# Altium PCB RF_board_rev3.PcbDoc
Units mil, origin at the board's own origin, x right, y up, seen from the top; angles counter-clockwise.
Board outline 4000 x 4000 mil, 4 copper layers (915MHz_top, 915MHz_bottom, 433MHz_bottom, 433MHz_top), stack 38.2 mil thick; 87 components, 63 nets, 381 pads, 488 vias.
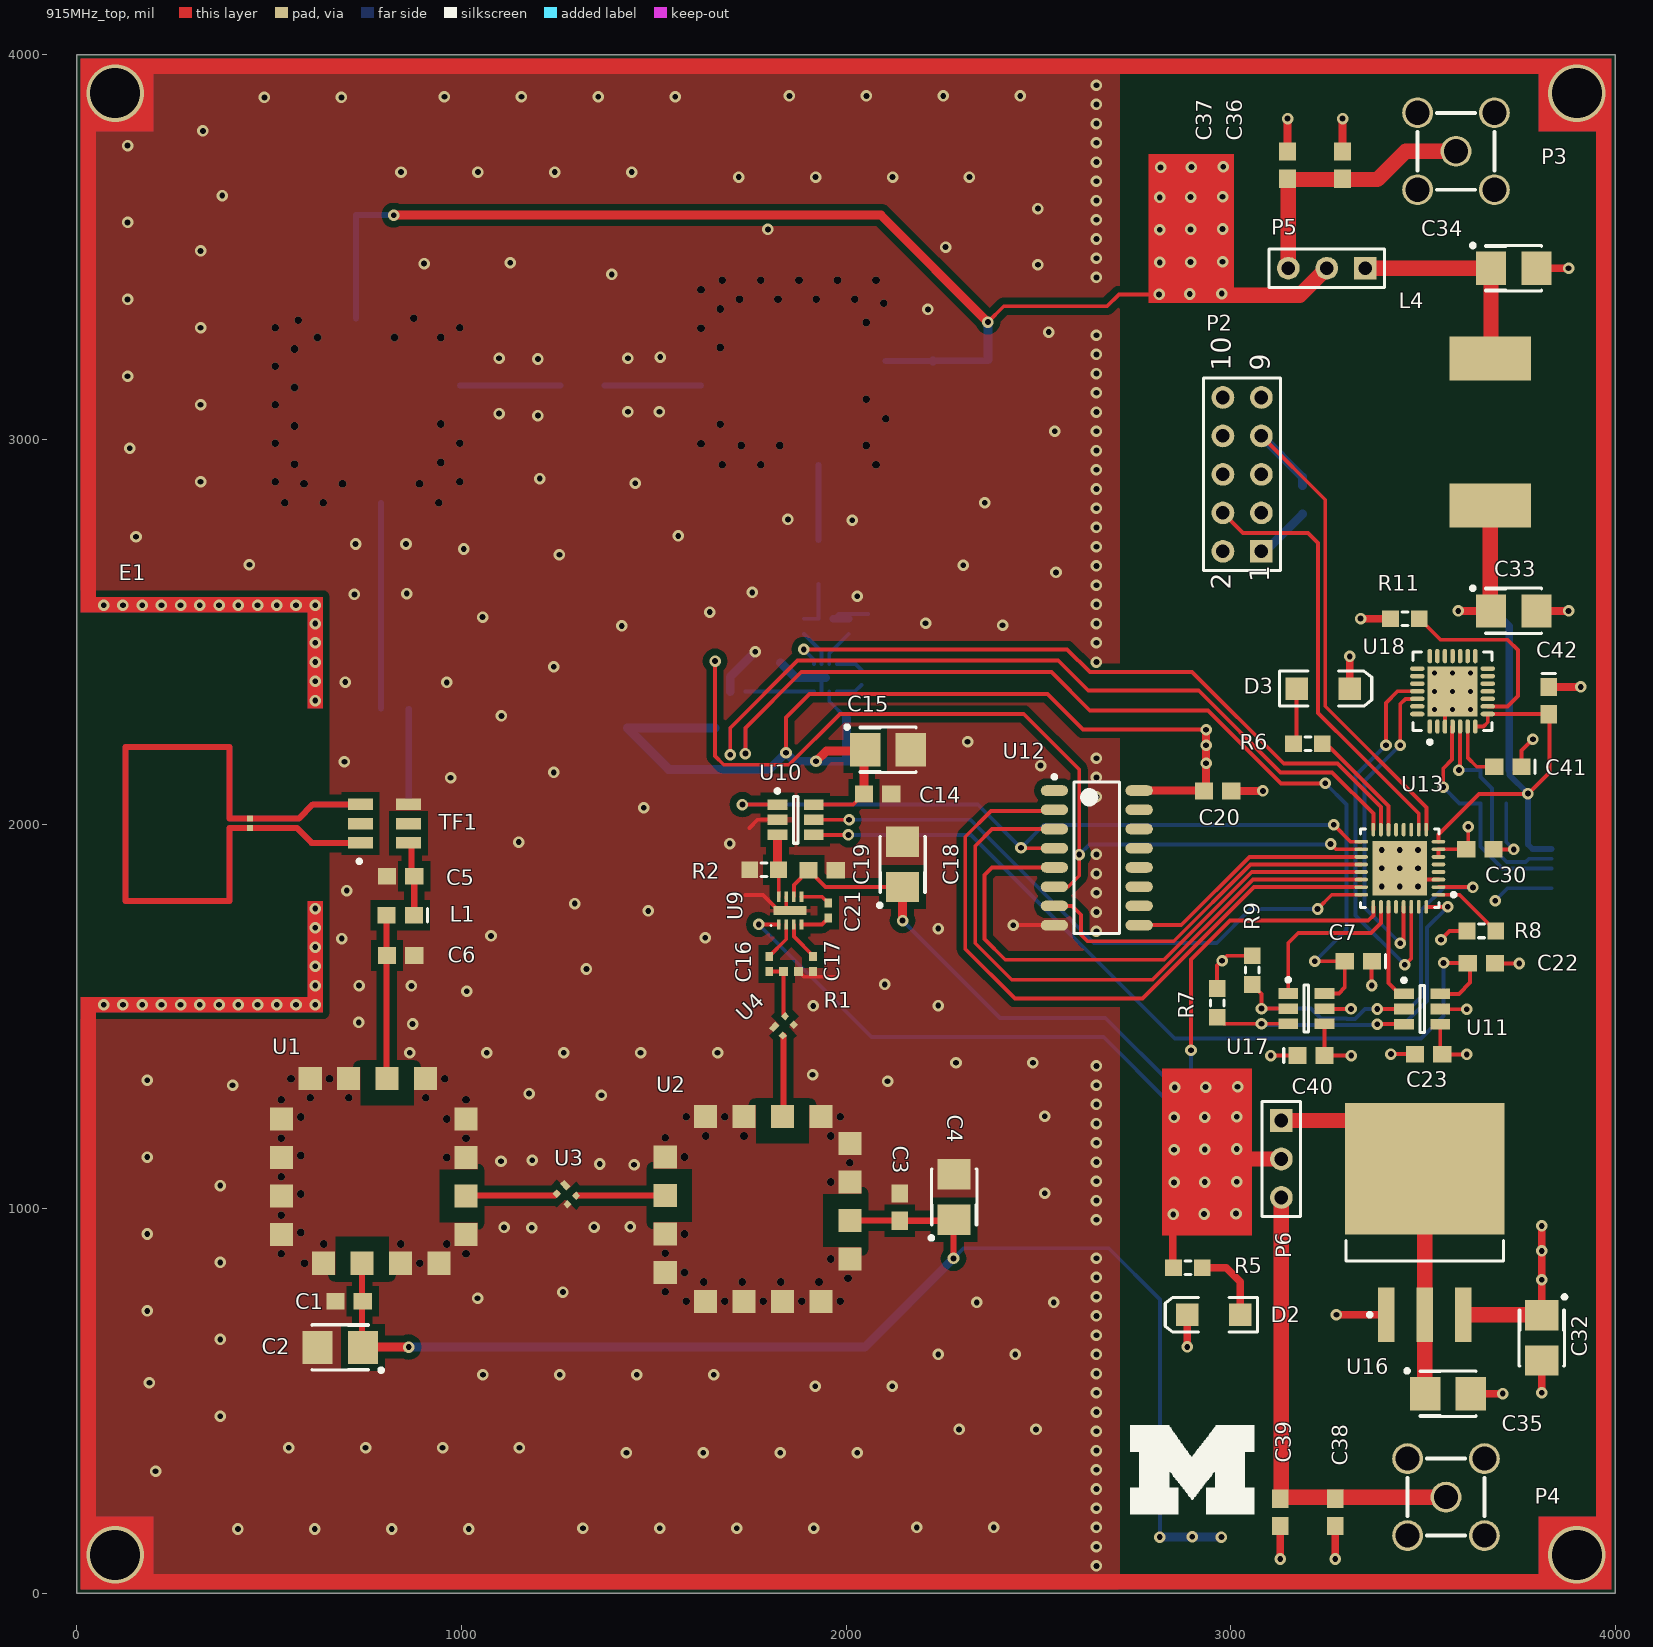
[diagram p0: 915MHz_top view]
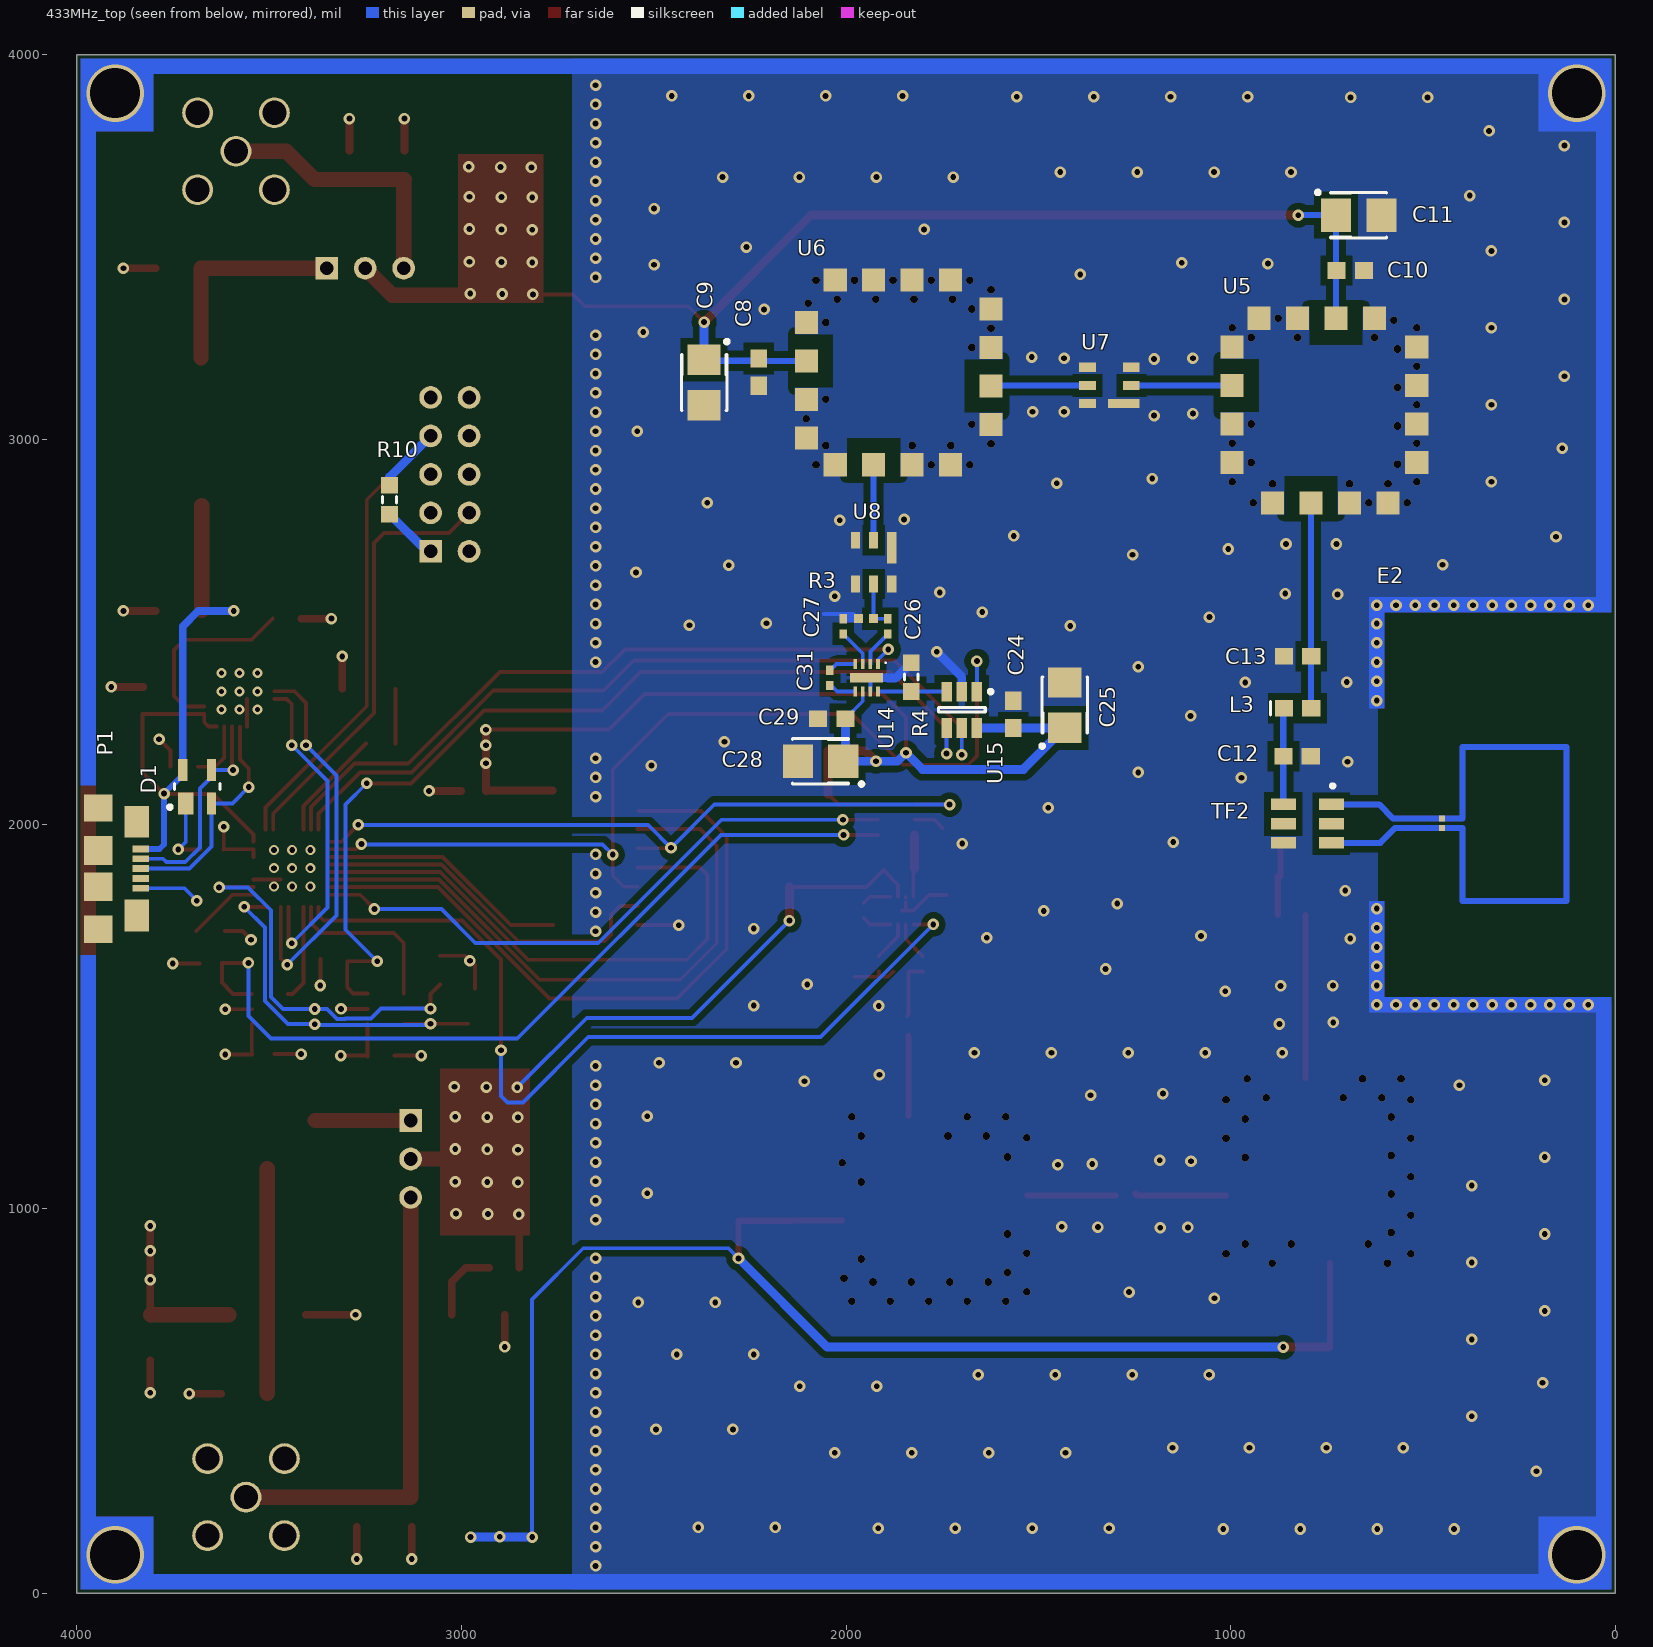
[diagram p1: 433MHz_top view, seen from below]
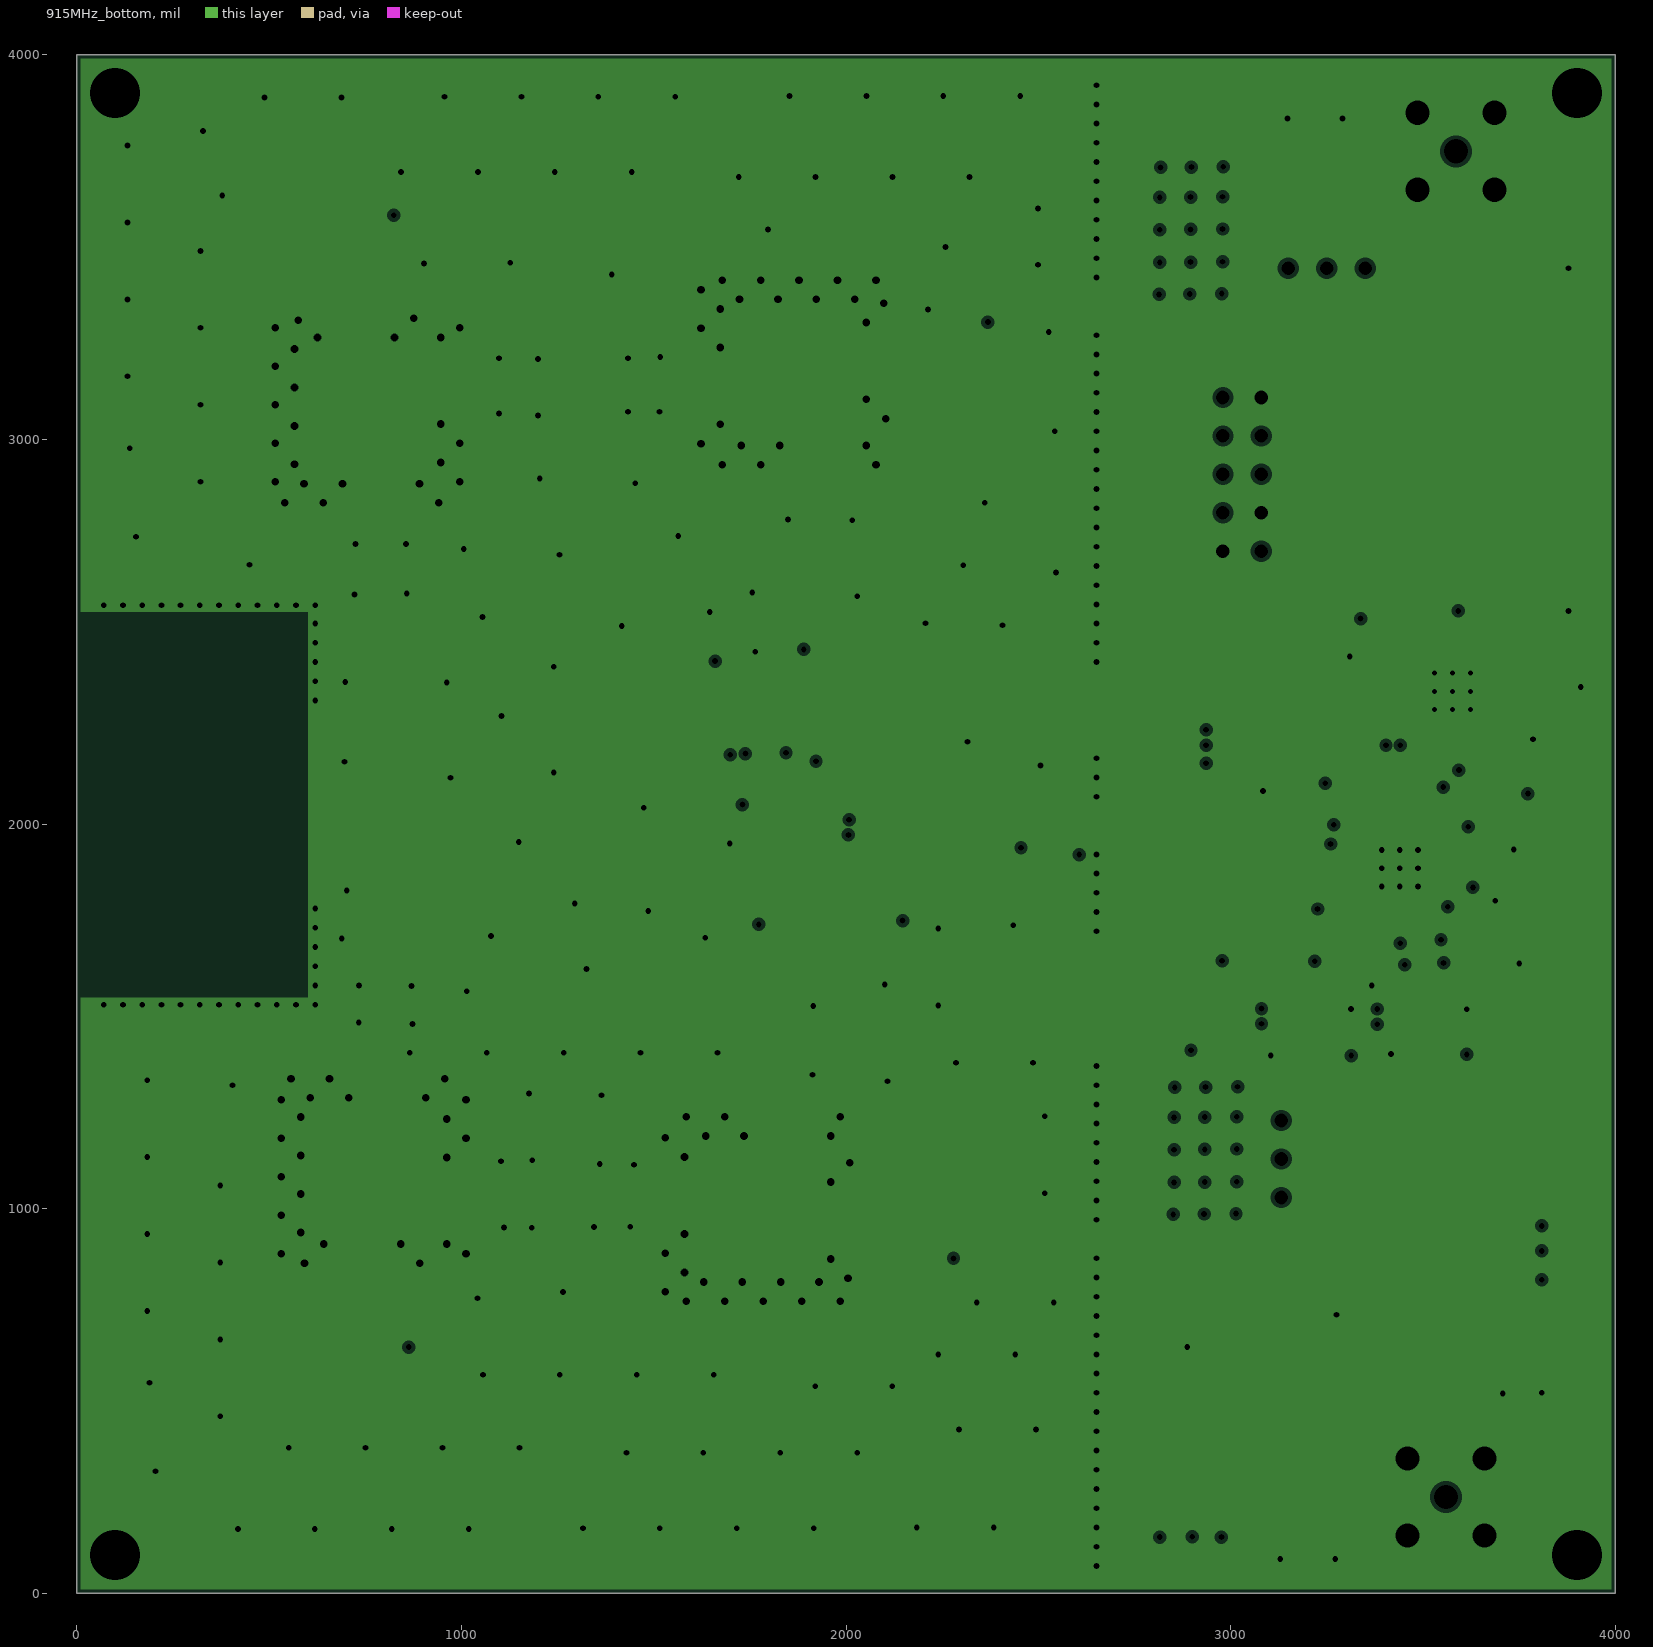
[diagram p2: 915MHz_bottom, clearances drawn from the general rule]
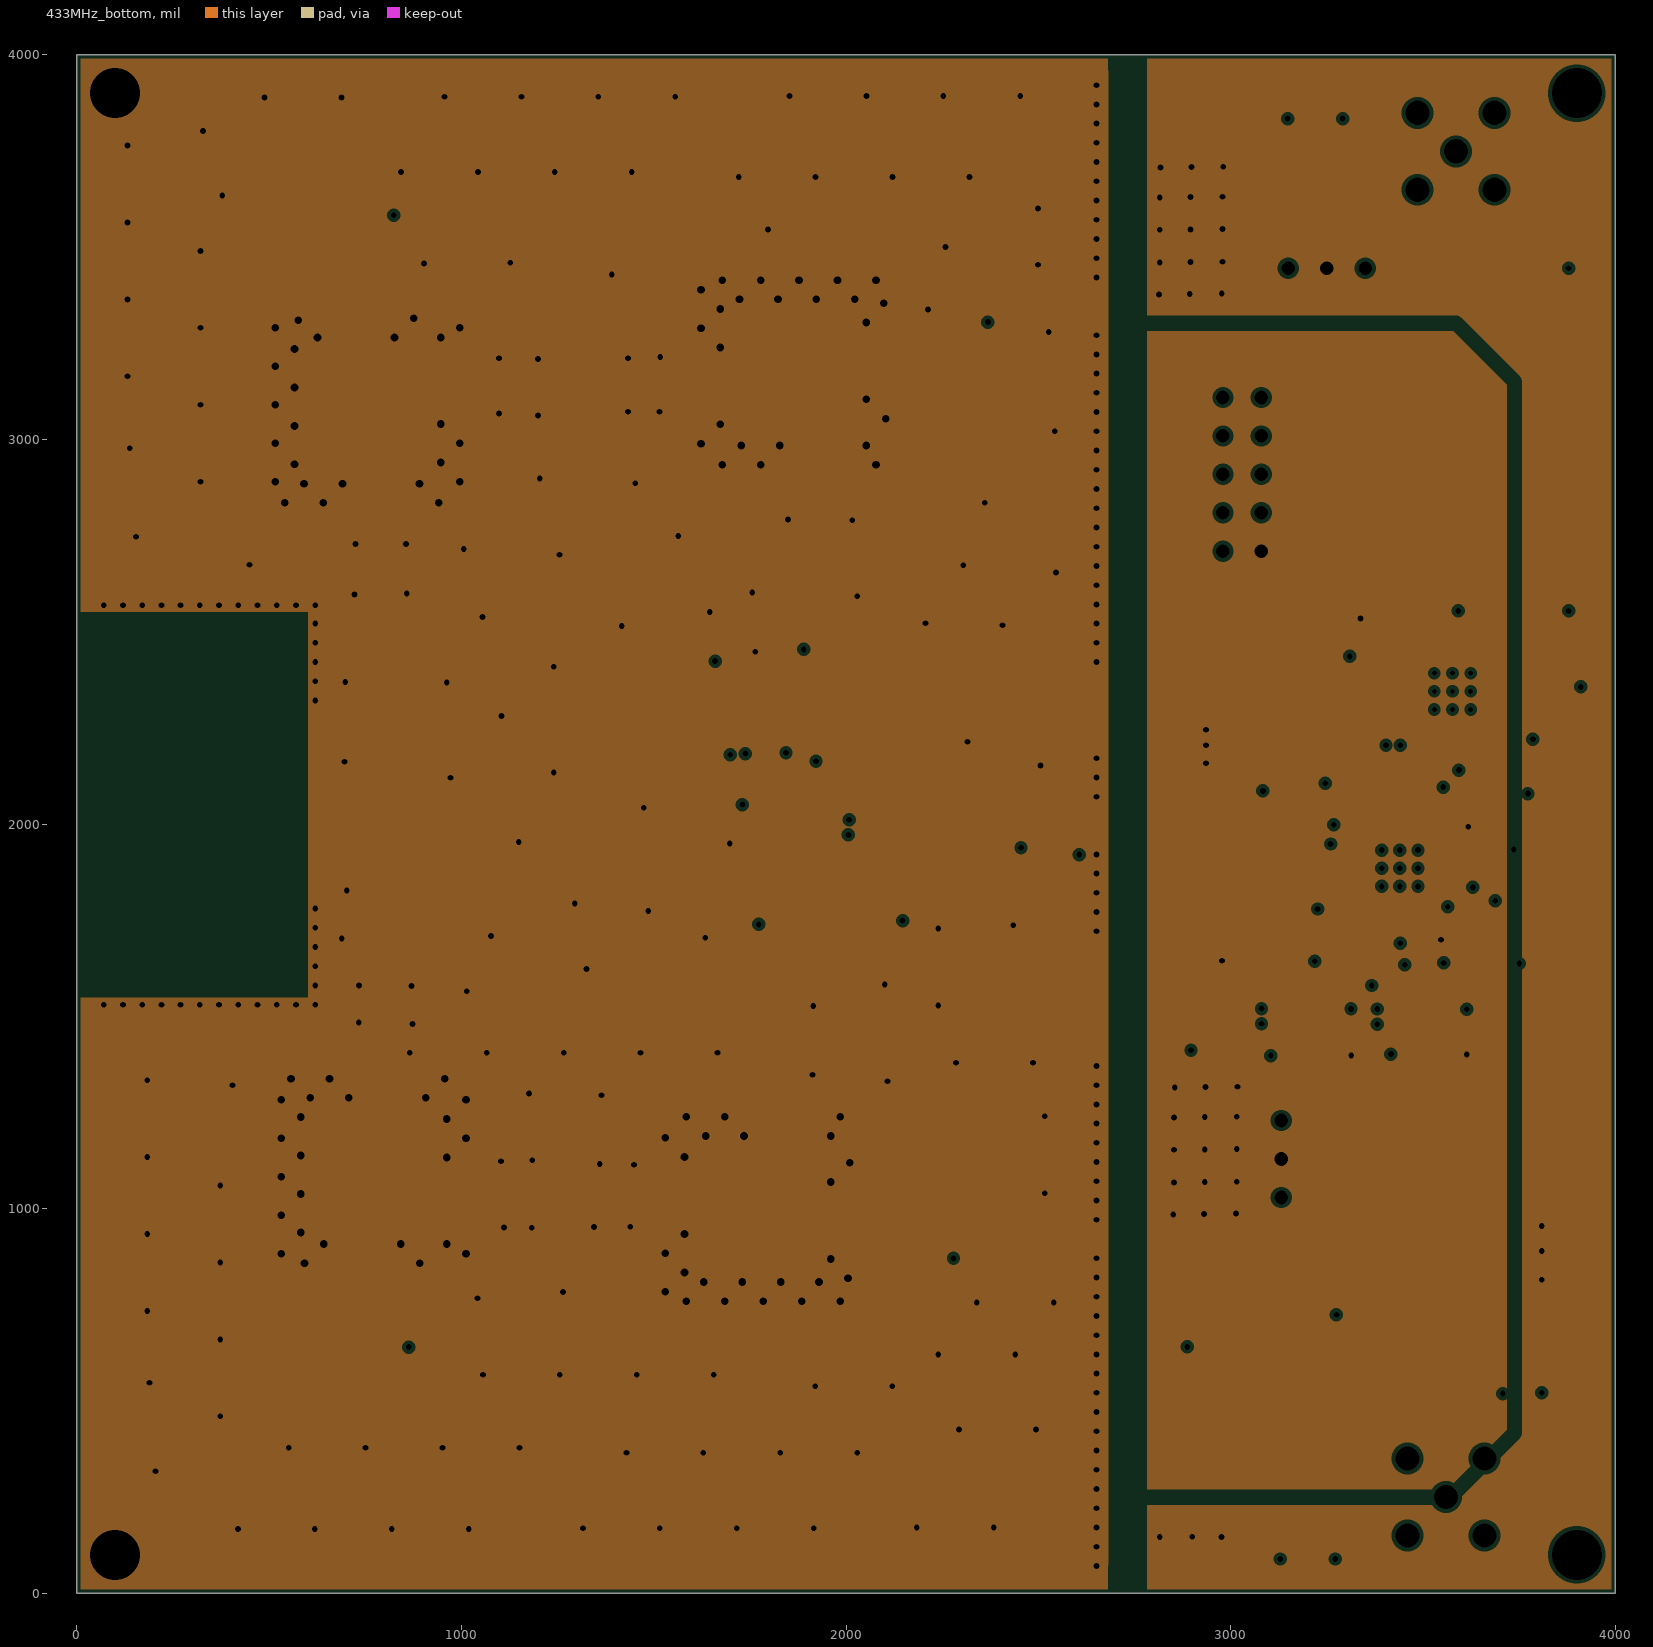
[diagram p3: 433MHz_bottom, clearances drawn from the general rule]

## Layer stack, top to bottom
915MHz_top: signal copper 1.4
Dielectric: core 10, Rogers 4350B, Dk 4.8
915MHz_bottom: plane copper 1.4, net GND
Dielectric: prepreg 12.6, FR-4, Dk 4.8
433MHz_bottom: plane copper 1.4, net (Multiple Nets)
Dielectric: core 10, Rogers 4350B, Dk 4.8
433MHz_top: signal copper 1.4

## Board outline
0,0 4000,0 4000,4000 0,4000

## Design rules (kind name [scope] priority, off if disabled: settings)
Clearance Antenna_Clearance [(InComponent('E1') OR InComponent('E2'))] p1: gap=0
Clearance [All] p2: gap=6
HoleSize [All] p1: absolutevalues=TRUE maxlimit=99999 minlimit=1 maxpercent=80.000 minpercent=20.000
MinimumSolderMaskSliver [All] p1: minsoldermaskwidth=0
PlaneClearance [All] p1: clearance=10
PlaneConnect [All] p1: planeconnectstyle=Direct reliefexpansion=20 reliefentries=4 reliefconductorwidth=10 reliefairgap=10
PolygonConnect [InNet('GND')] p1: connectstyle=Direct reliefconductorwidth=10 reliefentries=4 polygonreliefangle="90 Angle" airgapwidth=10
RoomDefinition Microcontroller [InComponentClass('Microcontroller')] p1: confinementstyle=ConfineIn formatcopy=TRUE lockcomponents=FALSE outline 1345,-195 4125,-195 4125,4165 1345,4165
RoomDefinition "Analog Front End" [InComponentClass('Analog Front End')] p2: confinementstyle=ConfineIn formatcopy=TRUE lockcomponents=FALSE outline -225,-345 2605,-345 2605,4160 -225,4160
RoutingVias [All] p1: holewidth=28 width=50 viastyle="Through Hole" minholewidth=28 minwidth=50 maxholewidth=28 maxwidth=50
ShortCircuit Antenna_E2 [InNet('NetE2_1') vs InNet('NetE2_2')] p1: allowed=TRUE
ShortCircuit Antenna_E1 [InNet('NetE1_1') vs InNet('NetE1_2')] p2: allowed=TRUE
SilkToSilkClearance [All] p1: silktosilkclearance=2
SilkToSolderMaskClearance SilkscreenOverComponentPads [IsPad] p1: minsilkscreentomaskgap=2 clearancetoexposedcopper=TRUE
SolderMaskExpansion [All] p1: expansion=4
Width [All] p1: maxlimit=40 minlimit=2 preferedwidth=10
21 further rules are at their usual default settings.

## Classes and differential pairs
component class "Analog Front End": C1 C2 C3 C4 C5 C6 C8 C9 C10 C11 C12 C13 E1 E2 L1 L3 TF1 TF2 U1 U2 U3 U4 U5 U6 U7 U8
component class Microcontroller: C7 C14 C15 C16 C17 C18 C19 C20 C21 C22 C23 C24 C25 C26 C27 C28 C29 C30 C31 C32 C33 C34 C35 C36 C37 C38 C39 C40 C41 C42 D1 D2 D3 L4 P1 P2 P3 P4 P5 P6 R1 R2 R3 R4 R5 R6 R7 R8 R9 R10 R11 U9 U10 U11 U12 U13 U14 U15 U16 U17 U18

## Components (designator, comment, footprint, x,y, rotation, side; value= is the part's Value field where it differs from the comment)
C1 "Cap Semi" CAPC1608M 708,759 r180 top
C2 "Cap Pol3" B 685,639 r180 top
C3 "Cap Semi" CAPC1608M 2140,1004 r90 top
C4 "Cap Pol3" B 2281,1030 r90 top
C5 "GQM1885C2A2R2BB01D" CAPC1608M 842,1864 r0 top
C6 "GQM1885C2A2R2BB01D" CAPC1608M 842,1658 r180 top
C7 "Cap Semi" CAPC1608M 3332,1643 r180 top
C8 "Cap Semi" CAPC1608M 2227,3175 r270 bottom
C9 "Cap Pol3" B 2369,3148 r270 bottom
C10 "Cap Semi" CAPC1608M 689,3439 r180 bottom
C11 "Cap Pol3" B 667,3583 r180 bottom
C12 "GQM1885C1H150JB01D" CAPC1608M 827,2176 r0 bottom
C13 "GQM1885C1H150JB01D" CAPC1608M 826,2436 r180 bottom
C14 "Cap Semi" CAPC1608M 2082,2078 r180 top
C15 "Cap Pol3" B 2109,2193 r0 top
C16 "Cap Semi" CAPC1005L 1800.19,1636 r270 top
C17 "Cap Semi" CAPC1005L 1914.19,1636 r270 top
C18 "Cap Pol3" B 2147,1895 r90 top
C19 "Cap Semi" CAPC1608M 1938,1880 r0 top
C20 "Cap Semi" CAPC1608M 2966,2086 r180 top
C21 "Cap Semi" CAPC1005L 1954,1775 r270 top
C22 "Cap Semi" CAPC1608M 3652,1638 r180 top
C23 "Cap Semi" CAPC1608M 3515,1401 r0 top
C24 "Cap Semi" CAPC1608M 1565,2285 r270 bottom
C25 "Cap Pol3" B 1431,2309 r90 bottom
C26 "Cap Semi" CAPC1005L 1891,2514 r90 bottom
C27 "Cap Semi" CAPC1005L 2007,2514 r90 bottom
C28 "Cap Pol3" B 2066,2163 r0 bottom
C29 "Cap Semi" CAPC1608M 2037,2274 r0 bottom
C30 "Cap Semi" CAPC1608M 3648,1934 r180 top
C31 "Cap Semi" CAPC1005L 2042,2380 r90 bottom
C32 "Cap Pol3" B 3809,664 r270 top
C33 "Cap Pol3" B 3736,2554 r0 top
C34 "Cap Pol3" B 3736,3445 r0 top
C35 "Cap Pol3" B 3565,519 r0 top
C36 "Cap Semi" CAPC1608M 3291,3713 r90 top
C37 "Cap Semi" CAPC1608M 3148,3713 r90 top
C38 "Cap Semi" CAPC1608M 3272,210 r270 top
C39 "Cap Semi" CAPC1608M 3129,210 r270 top
C40 "Cap Semi" CAPC1608M 3209,1398 r0 top
C41 "Cap Semi" CAPC1608M 3721,2149 r180 top
C42 "Cap Semi" CAPC1608M 3827,2321 r270 top
D1 "SP0503BAHT" SOT190P230X110-4M 3687,2097 r90 bottom
D2 "LED2" 3.2X1.6X1.1 2956,724 r180 top
D3 "LED2" 3.2X1.6X1.1 3241,2352 r0 top
E1 "PCB Trace Antenna" "PCB Trace Antenna"#1 450,2000 r0 top
E2 "PCB Trace Antenna" "PCB Trace Antenna"#2 450,2000 r0 bottom
L1 "LQW18AN22NJ00D" INDC1608M 841,1763 r180 top
L3 "LQW18AN12NJ00D" INDC1608M 826,2301 r180 bottom
L4 "SRR1260" SRR1260 3675,2828 r180 top
P1 "USB Mini" "Hirose - ZX62-B-5PA(11)" 3834,1884 r180 bottom
P2 "Header 5X2" HDR2X5 3080,2709 r90 top
P3 "COAX-M" "SMA Connector" 3586,3749 r90 top
P4 "COAX-M" "SMA Connector" 3560,250 r0 top
P5 "Header 3" HDR1X3 3350,3445 r180 top
P6 "Header 3" HDR1X3 3132,1229 r270 top
R1 "Res3" RESC1005L 1857.19,1616 r180 top
R2 "Res3" RESC1608M 1787,1881 r0 top
R3 "Res3" RESC1005L 1948,2534 r180 bottom
R4 "Res3" RESC1608M 1830,2382 r270 bottom
R5 "Res3" RESC1608M 2889,846 r180 top
R6 "Res3" RESC1608M 3201,2209 r0 top
R7 "Res3" RESC1608M 2965,1535 r90 top
R8 "Res3" RESC1608M 3652,1722 r180 top
R9 "Res3" RESC1608M 3056,1620 r90 top
R10 "Res3" RESC1608M 3187,2843 r270 bottom
R11 "Res3" RESC1608M 3453,2534 r0 top
TF1 "TCM4-14+" TCM4-14+ 738,1951 r90 top
TF2 "TCM4-14+" TCM4-14+ 738,2051 r270 bottom
U1 "RAMP-33LN+" RAMP-33LN+ 907,1338 r180 top
U2 "RAMP-33LN+" RAMP-33LN+ 1530,1134 r270 top
U3 "SF16-0953M4UU01" SF16-0953M4UU01 1248,1039 r225 top
U4 "SF16-0953M4UU01" SF16-0953M4UU01 1836,1450 r315 top
U5 "RAMP-33LN+" RAMP-33LN+ 891,2835 r180 bottom
U6 "RAMP-33LN+" RAMP-33LN+ 1623,3039 r90 bottom
U7 "SAW Filter" "Epcos SAW Filter" 1256,3093 r90 bottom
U8 "SAW Filter" "Epcos SAW Filter" 1881,2740 r0 bottom
U9 "LT5537" "DDB Package" 1825,1739 r90 top
U10 "LT6230" SOT100P275-6M 1869,2011 r0 top
U11 "LTC2630" SOT100P275-6M 3498,1519 r0 top
U12 "MC14043BDG" SOIC127P602-16BM 2652,1912 r0 top
U13 "C8051F342" QFN50P500X500-32VBM 3440,1885 r180 top
U14 "LT5537" "DDB Package" 1917,2416 r270 bottom
U15 "LT6230" SOT100P275-6M 1699,2297 r270 bottom
U16 "LT1086CM-3.3" TO254P1420-4AM 3505,964 r90 top
U17 "LTC2630" SOT100P275-6M 3197,1520 r0 top
U18 "CP2102" QFN50P500X500-28V1L 3577,2345 r90 top

## Footprints (in the part's own frame and the unit in brackets; to place one, negate y for a bottom-side part, rotate by r counter-clockwise, add the part's x,y. Pads: shape width x height; smd on the part's side, far side on the other; paste and mask are expansions set on the pad)
3.2X1.6X1.1 [mm] "SMT LED; 2 Flat Leads"
  rect 1.5x1.5 smd: 1(-1.75,0) 2(1.75,0)
  silkscreen extent -2.9,-1.15 3.2,1.15
B [mm] "Capacitor, SM Tantalum; Body 3.5 x 2.8 mm (LxW typ)"
  rect 2x2.2 smd: 1(-1.5,0) 2(1.5,0)
  silkscreen extent -2.83,-1.5 1.85,1.62
CAPC1005L [mm] "Chip Capacitor, Body 1.0x0.5mm, IPC High Density"
  rect 0.6x0.5 smd: 1(-0.5,0) 2(0.5,0)
  body extent -0.55,-0.3 0.55,0.3, height 0.6
CAPC1608M [mm] "Chip Capacitor, Body 1.6x0.8mm, IPC Low Density"
  rect 1.2x1.1 smd: 1(-0.9,0) 2(0.9,0)
  body extent -0.87,-0.48 0.87,0.48, height 0.85
"DDB Package" [mm] "8-Lead Plastic DFN (3mm x 2mm)"
  rect 0.675x0.25 smd: 1(0,0) 2(0,-0.5) 3(0,-1) 4(0,-1.5) 5(1.825,-1.5) 6(1.825,-1) 7(1.825,-0.5) 8(1.825,0)
  rect 0.61x2.2 smd: 9(0.913,-0.75)
  silkscreen extent -0.1,0.48 -0.05,0.53
"Epcos SAW Filter" [mm] "3.0 x 3.0 x 1.1 mm3 SMT SAW Filter"
  rect 0.6x2.1 smd: 1(0,0.55)
  rect 0.6x1.1 smd: 2(1.2,0.05) 3(2.4,0.05) 4(2.4,2.95) 5(1.2,2.95) 6(0,2.95)
  body extent -0.3,0 2.7,3, height 1.14
HDR1X3 [mm] "Connector; Header; 3 Position"
  rect 1.5x1.5 hole 0.9: 1(0,0)
  round 1.5 hole 0.9: 2(2.54,0) 3(5.08,0)
  silkscreen extent -1.27,-1.27 6.35,1.27, body extent -1.27,-1.46 6.35,1.46, height 8.51
HDR2X5 [mm] "Connector; Header; 5x2 Position"
  rect 1.5x1.5 hole 0.9: 1(0,0)
  round 1.5 hole 0.9: 2(0,2.54) 3(2.54,0) 4(2.54,2.54) 5(5.08,0) 6(5.08,2.54) 7(7.62,0) 8(7.62,2.54) 9(10.16,0) 10(10.16,2.54)
  silkscreen extent -1.27,-1.27 11.43,3.81
"Hirose - ZX62-B-5PA(11)" [mm] "CONN RCPT MICRO USB B SMD R/A"
  rect 1.1x0.45 smd: 1(0,1.3) 2(0,0.65) 3(0,0) 4(0,-0.65) 5(0,-1.3)
  rect 1.9x1.8 smd: ""(-2.8,-4) ""(-2.8,4)
  rect 1.9x1.9 smd: ""(-2.8,-1.2) ""(-2.8,1.2)
  rect 1.6x2.1 smd: ""(-0.25,-3.1) ""(-0.25,3.1)
INDC1608M [mm] "Chip Inductor, Body 1.6x0.8mm, IPC Low Density"
  rect 1.2x1.1 smd: 1(-0.9,0) 2(0.9,0)
  silkscreen extent -1.8,-0.45 -1.8,0.45, body extent -0.87,-0.48 0.87,0.48, height 0.71
"PCB Trace Antenna"#1 [mil] "PCB Trace Antenna to be used for RF board"
  rect 16x16 smd: 1(0,14) 2(0,-10)
  915MHz_top lines w16: 0,-10 -53,-10 -53,-200 -323,-200 -323,200 -53,200 -53,14 0,14
"PCB Trace Antenna"#2 [mil] "PCB Trace Antenna to be used for RF board"
  rect 16x16 smd: 1(0,10) 2(0,-14)
  915MHz_top lines w16: 0,10 -53,10 -53,200 -323,200 -323,-200 -53,-200 -53,-14 0,-14
QFN50P500X500-28V1L [mm] "QFN, 28-Leads, Body 5x5mm, Pitch 0.5mm, IPC High Density"
  oval 0.95x0.3 smd: 1(-2.325,1.5) 2(-2.325,1) 3(-2.325,0.5) 4(-2.325,0) 5(-2.325,-0.5) 6(-2.325,-1) 7(-2.325,-1.5) 15(2.325,-1.5) 16(2.325,-1) 17(2.325,-0.5) 18(2.325,0) 19(2.325,0.5) 20(2.325,1) 21(2.325,1.5)
  oval 0.3x0.95 smd: 8(-1.5,-2.325) 9(-1,-2.325) 10(-0.5,-2.325) 11(0,-2.325) 12(0.5,-2.325) 13(1,-2.325) 14(1.5,-2.325) 22(1.5,2.325) 23(1,2.325) 24(0.5,2.325) 25(0,2.325) 26(-0.5,2.325) 27(-1,2.325) 28(-1.5,2.325)
  rect 3.3x3.3 smd: 29(0,0)
  silkscreen extent -3.47,-2.6 2.6,2.6, body extent -2.58,-2.58 2.58,2.58, height 1
QFN50P500X500-32VBM [mm] "32-Pin Plastic Quad Flat No-Lead 0.5 mm Pitch"
  oval 0.9x0.25 smd: 1(-2.55,1.75) 2(-2.55,1.25) 3(-2.55,0.75) 4(-2.55,0.25) 5(-2.55,-0.25) 6(-2.55,-0.75) 7(-2.55,-1.25) 8(-2.55,-1.75) 17(2.55,-1.75) 18(2.55,-1.25) 19(2.55,-0.75) 20(2.55,-0.25) 21(2.55,0.25) 22(2.55,0.75) 23(2.55,1.25) 24(2.55,1.75)
  oval 0.25x0.9 smd: 9(-1.75,-2.55) 10(-1.25,-2.55) 11(-0.75,-2.55) 12(-0.25,-2.55) 13(0.25,-2.55) 14(0.75,-2.55) 15(1.25,-2.55) 16(1.75,-2.55) 25(1.75,2.55) 26(1.25,2.55) 27(0.75,2.55) 28(0.25,2.55) 29(-0.25,2.55) 30(-0.75,2.55) 31(-1.25,2.55) 32(-1.75,2.55)
  rect 3.6x3.6 smd: 33(0,0)
  silkscreen extent -3.68,-2.6 2.6,2.6, body extent -2.58,-2.58 2.58,2.58, height 1
RAMP-33LN+ [mil] "Mini-Circuits RAMP-33LN+ Low Noise Amplifier 50 to 3000 MHz"
  rect 60x60 smd: 1(0,0) 2(100,0) 3(200,0) 4(300,0) 5(375,105) 6(375,205) 7(375,305) 8(375,405) 9(265,480) 10(165,480) 11(65,480) 12(-35,480) 13(-105,405) 14(-105,305) 15(-105,205) 16(-105,105)
RESC1005L [mm] "Chip Resistor, Body 1.1x0.5mm, IPC High Density"
  rect 0.6x0.6 smd: 1(-0.5,0) 2(0.5,0)
  body extent -0.55,-0.3 0.55,0.3, height 0.4
RESC1608M [mm] "Chip Resistor, Body 1.6x0.8mm, IPC Low Density"
  rect 1.1x1.1 smd: 1(-0.95,0) 2(0.95,0)
  silkscreen extent -0.2,-0.45 0.2,0.45, body extent -0.85,-0.48 0.85,0.48, height 0.6
SF16-0953M4UU01 [mm] "AVX Corp/Kyocera Corp - FILTER SAW 953MHZ RF SMD"
  rect 0.4x0.4 smd: 1(0,0) 2(0,1) 3(-0.8,1)
  rect 0.4x0.6 smd: 4(-0.8,0)
"SMA Connector" [mil] "Footprint taken from SAMTEC SMA"
  round 80 hole 63: 1(0,0) 2(-100,100) 3(100,100) 4(-100,-100) 5(100,-100)
  silkscreen extent -100,-100 100,100
SOIC127P602-16BM [mm] "SOIC, 16-Leads, Body 9.9x3.9mm, Pitch 1.27mm, IPC Low Density"
  oval 1.8x0.7 smd: 1(-2.8,4.445) 2(-2.8,3.175) 3(-2.8,1.905) 4(-2.8,0.635) 5(-2.8,-0.635) 6(-2.8,-1.905) 7(-2.8,-3.175) 8(-2.8,-4.445) 9(2.8,-4.445) 10(2.8,-3.175) 11(2.8,-1.905) 12(2.8,-0.635) 13(2.8,0.635) 14(2.8,1.905) 15(2.8,3.175) 16(2.8,4.445)
  silkscreen extent -2.92,-5 1.5,5.47, body extent -2,-5 2,5, height 1.73
SOT100P275-6M [mm]
  rect 1.3x0.7 smd: 1(-1.2,1) 2(-1.2,0) 3(-1.2,-1) 4(1.2,-1) 5(1.2,0) 6(1.2,1)
  silkscreen extent -1.32,-1.55 0.15,2.02, body extent -0.9,-1.55 0.9,1.55
SOT190P230X110-4M [mm] "SOT143, 4-Leads, Body 2.9x1.3mm, Pitch 1.9mm, Lead Span 2.3mm, IPC Low Density"
  rect 1.45x1 smd: 1(-1.1,0.75)
  rect 1.45x0.6 smd: 2(-1.1,-0.95) 3(1.1,-0.95) 4(1.1,0.95)
  silkscreen extent -1.47,-1.5 0.2,1.93, body extent -0.7,-1.52 0.7,1.52, height 1.1
SRR1260 [mil] "Bourns - SRR1260 Series - Shielded SMD Power Inductors"
  rect 213x114 smd: 1(0,0) 2(0,-382)
  body extent -244,-435 248,57, height 248
TCM4-14+ [mil] "Mini-Circuits - Surface Mount RF Transformer"
  rect 30x65 smd: 1(-0.01,-0.01) 2(50,0) 3(100,0) 4(100.01,-124.99) 5(50.01,-124.99) 6(0,-125)
  silkscreen extent -53,-1 -44,8
TO254P1420-4AM [mm] "D2-PAK, 4-Leads, Body 8.6x10.2mm, Pitch 2.54mm, Lead Span 14.2mm, IPC Low Density"
  rect 3.6x1.1 smd: 1(-6.1,2.54) 2(-6.1,0) 3(-6.1,-2.54)
  rect 8.7x10.55 smd: 4(3.55,0)
  silkscreen extent -6.22,-5.2 -1.2,5.2, body extent -2.55,-5.2 6.34,5.2, height 4.64

## Part data
C1 C3 C7 C8 C10 C14 C16 C17 C19 C20 C21 C22 C23 C24 C26 C27 C29 C30 C31 C36 C37 C38 C39 C40 C41 C42: "Capacitor (Semiconductor SIM Model)"
C2 C4 C9 C11 C15 C18 C25 C28 C32 C33 C34 C35: "Polarized Capacitor (Surface Mount)"
C5 C6 C12 C13: library part "Cap Semi", "Capacitor (Semiconductor SIM Model)"
D1: "Littelfuse Inc - TVS AVAL DIODE ARRAY 3 CH SOT143"
D2 D3: "Typical RED, GREEN, YELLOW, AMBER GaAs LED"
L1 L3: library part Inductor, "Inductor"
L4: library part "Inductor Iron", "Magnetic-Core Inductor"
P1: "Hirose Electric Co Ltd - CONN RCPT MICRO USB B SMD R/A"
P2: "Header, 5-Pin, Dual row"
P3 P4: "RF Coaxial PCB Connector, MMCX; Thru-Hole, Vertical Mount Plug,  50 Ohm Impedance"
P5 P6: "3-pin, IDC Jumper"
R1 R2 R3 R4 R5 R6 R7 R8 R9 R10 R11: "Resistor"
TF1 TF2: "Mini-Circuits Surface Mount RF Transformer"
U1 U2 U5 U6: "Mini-Circuits - RAMP-33LN+"
U3 U4: "AVX Corp/Kyocera Corp - FILTER SAW 953MHZ RF SMD"
U9 U14: "Linear Technology - IC RF/IF LOG DETECTOR 8-DFN"
U10 U15: "Linear Technology - IC OP AMP 3.4MA 215MHZ SOT23-6"
U11 U17: "Linear Technology - IC DAC 12BIT R-R SC70-6"
U12: "ON Semiconductor - IC LATCH R-S QUAD NOR 16SOIC"
U13: "Silicon Laboratories Inc - IC 8051 MCU 64K FLASH MEM 32-QFN"
U16: "Linear Technology - IC REG LDO 3.3V 3DD"
U18: "IC USB-TO-UART BRIDGE 28VQFN"

## Via types
v1: diameter 30, hole 15, 915MHz_top to 433MHz_top, tented both sides, 366 vias
v2: diameter 20, hole 20, 915MHz_top to 433MHz_top, tented both sides, 100 vias
v3: diameter 25.98, hole 15, 915MHz_top to 433MHz_top, tented top, 9 vias
v4: diameter 25.98, hole 12.99, 915MHz_top to 433MHz_top, tented top, 9 vias
v5: diameter 150, hole 130, 915MHz_top to 433MHz_top, 4 vias

## Nets (pads, with @x,y where several pads share a name; then routed paths per layer and width w, separated by ;. In a path a pad name is that pad's centre, name@x,y a point inside that pad or via, vN(x,y) a via of type N, cw(c..) or ccw(c..) an arc to the next point about the centre after c; other vN are vias at no path point)
433_DET_EN: U13.15 U14.1 | length 1778.4
  915MHz_top w10: v1(1890,2454) 2575,2454 2634,2395 2900,2395 3138,2157 3277.78,2157 3390.79,2043.99 U13.15
  433MHz_top w10: v1(1890,2454) 1917,2427 U14.1
433_EN: U13.16 U15.5 | length 2090.6
  915MHz_top w10: v1(1699,2180) 1699,2249.76 1874.24,2425 2552,2425 2630,2347 2917,2347 3130,2134 3264,2134 3371.1,2026.9 U13.16
  433MHz_top w10: v1(1699,2180) U15.5
915_DET_EN: U9.1 U13.25 | length 2273.7
  915MHz_top w10: v1(1773,1739) U9.1 ; v1(2897,1412) 2897,1648 2998,1749 3358,1749 3371.1,1762.1 U13.25
  433MHz_top w10: v1(1773,1739) 2066,1446 2670,1446 2840,1276 2880,1276 2897,1293 v1(2897,1412)
915_EN: U10.5 U13.24 | length 1608.7
  915MHz_top w10: U10.5 v1@2009,2011 ; v1(3226,1779) 3263.1,1816.1 U13.24
  433MHz_top w10: v1(2008,2011) 2324,2011 2644,1691 2964,1691 3052,1779 v1(3226,1779)
+3.3V: C14.2 C15.1 C18.1 C19.1 C20.2 C23.2 C24.2 C25.1 C28.1 C29.1 C30.2 C40.2 P2.1 P6.2 R5.2 R7.2 R8.2 R9.2 R10.2 R11.1 U9.6 U10.6 U11.4 U12.16 U13.6 U13.7 U14.6 U15.6 U17.4 | length 5704.6
  915MHz_top w10: v1(1844,2185) 1844,2277 1905,2338 2524,2338 2616,2246 v1@2936.16,2246 ; U9.6 1864.37,1841.8 C19.1 1946.62,1835.94 C18.1 ; U10.6 2018.94,2050.37 C14.2 ; R7.2 2965,1632 2990.4,1657.4 R9.2 ; C40.2@3244.24,1395.19 U17.4 ; C40.2 v1(3313.91,1398) ; U13.6 U13.7 C30.2@3618.26,1934.21 ; C23.2@3544.53,1401 v1(3614,1401) ; C23.2@3545.24,1401.72 U11.4 ; v1@3547,1700 3569,1722 R8.2 ; v1(3618,1993) 3618,1934.47 C30.2@3618.47,1934
  915MHz_top w20: U12.16 C20.2@2929.57,2087 ; R5.2@2849.63,846 v1@2849.63,983.63 ; C20.2@2936.16,2086 v1(2936.16,2158) v1(2936.16,2205) v1(2936.16,2245) ; v1(3338,2534) R11.1
  915MHz_top w23: v1(1922,2163) 1948.62,2189.62 2046.57,2189.62 C14.2 ; v1(2147,1749) C18.1
  915MHz_top w40: 2842,1129 P6.2
  433MHz_top w10: U14.6 1956.37,2319.2 C29.1 ; v1(2147,1749) 2400,1496 2674,1496 v1(2855,1315)
  433MHz_top w23: U15.6 1431.19,2249.76 1538.94,2142 1801,2142 v1(1844,2185) 1866,2163 v1(1922,2163) C28.1 ; C28.1@2001.57,2168.38 C29.1 ; P2.1 3090.4,2709 R10.2
  other v1: 2851,985 2931,986 3014,987 2853,1068 2933,1069 3016,1070 2853,1153 2933,1154 3016,1155 2853,1237 2933,1238 3016,1239 2935,1316 3018,1317 2977.7,1644.7 3547,1699.21
+5V: C1.1 C2.1 C3.1 C4.1 C8.1 C9.1 C10.1 C11.1 C32.1 P5.2 U1.10 U2.10 U5.10 U6.10 U16.3 | length 7347.2
  915MHz_top w10: v1(2369,3305) 2410,3346 2679,3346 2710,3377 v1(2814,3377)
  915MHz_top w16: C2.1@742,642 U1.10 ; U2.10 C3.1@2139.53,969 ; C3.1@2140,968.53 2279.53,968.53 v1(2279.53,870.58)
  915MHz_top w20: C32.1 v1(3809,955)
  915MHz_top w23: C2.1@744.06,639.94 v1(862.94,639.94) ; v1(824,3583) 2091,3583 v1(2369,3305)
  915MHz_top w40: v1@2824,3375 3180,3375 P5.2 ; U16.3 C32.1@3808.21,723.84
  433MHz_top w10: v1(2279.53,870.58) 2305.94,897 2683,897 2816,764 v1(2816,146)
  433MHz_top w16: U5.10@726.06,3315.06 C11.1 v1(824,3583) ; U6.10 C8.1@2226.47,3204 ; C8.1@2227,3204.53 C9.1@2366.47,3204.53
  433MHz_top w23: v1(862.94,639.94) 2048.89,639.94 v1(2279.53,870.58) ; C8.1@2226.47,3204 C8.1@2227,3204.53 ; C9.1 v1(2369,3305) ; v1(2816,146) v1(2976,146)
  other v1: 2900,147 3809,815 3809,890 2894,3378 2977,3379 2816,3460 2896,3461 2979,3462 2816,3545 2896,3546 2979,3547 2816,3629 2896,3630 2979,3631 2818,3707 2898,3708 2981,3709
AMPREF_433: C7.2 U15.4 U17.6 | length 2550.2
  915MHz_top w10: v1@1738.37,2178.63 1738.37,2249.76 1883.61,2395 2534,2395 2633.75,2295.25 2940.75,2295.25 3131,2105 v1@3246,2105 ; v1(3219,1643) C7.2 3296.57,1574.57 3281.37,1559.37 U17.6
  433MHz_top w10: v1(1738.37,2183) U15.4 ; v1(3219,1643) 3301,1725 3301,2051 v1(3246,2106)
AMPREF_915: C22.2 U10.4 U11.6 | length 2228.5
  915MHz_top w10: U10.4 v1(2006.37,1971.63) ; U11.6 3593.37,1558.37 3622.47,1587.47 C22.2@3622.47,1638 ; v1(3553.72,1638.72) C22.2@3623.19,1638.72
  433MHz_top w10: v1(2006.37,1971.63) 2325.02,1971.63 2854.65,1442 3495,1442 3553.72,1500.72 v1(3553.72,1638.72)
C2D: P2.4 U13.10 | length 1133.7
  915MHz_top w10: P2.4 3032,2757 3201,2757 3227,2731 3227,2289 3274.35,2241.65 3274.61,2241.65 3489.21,2027.05 U13.10
D+: D1.2 P1.3 U18.4 | length 600.6
  915MHz_top w10: v1(3553,2096) 3553,2144.69 3576,2167.69 U18.4@3576,2252.46
  433MHz_top w10: v1(3553,2096) 3595.31,2053.69 D1.2 3649.6,1941.4 3707,1884 P1.3
D-: D1.3 P1.2 U18.5 | length 553.3
  915MHz_top w10: v1@3596.68,2143.3 U18.5
  433MHz_top w10: v1(3593.69,2140.31) D1.3 3649.6,2122.4 3680,2092 3680,1939 3718,1901 3767,1901 3775.59,1909.59 P1.2
DAC_C\S\_433: U13.26 U17.1 | length 435.8
  915MHz_top w10: U17.1 3149.76,1690.76 3176,1717 3365,1717 3390.79,1742.79 U13.26
DAC_C\S\_915: U11.1 U13.27 | length 250
  915MHz_top w10: U13.27 3410.47,1586.53 3438.63,1558.37 U11.1
GND: C1.2 C2.2 C3.2 C4.2 C5.1 C6.1 C7.1 C8.2 C9.2 C10.2 C11.2 C12.1 C13.1 C14.1 C15.2 C17.2 C18.2 C19.2 C20.1 C22.1 C23.1 C24.1 C25.2 C27.2 C28.2 C29.2 C30.1 C32.2 C33.2 C34.2 C35.2 C36.2 C37.2 C38.2 C39.2 C40.1 C41.1 C42.1 D1.1 D2.2 D3.2 P1.5 P2.2 P2.3 P2.9 P3.2 P3.3 P3.4 P3.5 P4.2 P4.3 P4.4 P4.5 R1.1 R2.1 R3.1 R4.1 TF1.4 TF2.4 U1.1 U1.3 U1.4 U1.5 U1.6 U1.7 U1.8 U1.9 U1.11 U1.12 U1.13 U1.15 U1.16 U2.1 U2.3 U2.4 U2.5 U2.6 U2.7 U2.8 U2.9 U2.11 U2.12 U2.13 U2.15 U2.16 U3.2 U3.4 U4.2 U4.4 U5.1 U5.3 U5.4 U5.5 U5.6 U5.7 U5.8 U5.9 U5.11 U5.12 U5.13 U5.15 U5.16 U6.1 U6.3 U6.4 U6.5 U6.6 U6.7 U6.8 U6.9 U6.11 U6.12 U6.13 U6.15 U6.16 U7.1 U7.3 U7.4 U7.6 U8.1 U8.3 U8.4 U8.6 U9.7 U9.9 U10.2 U11.5 U12.8 U13.3 U13.33 U14.7 U14.9 U15.2 U16.1 U17.5 U18.3 U18.29 | length 2989.2
  915MHz_top w10: 1738,1815 1784,1815 1824.07,1774.93 U9.9 ; 1749,1990 1770,2011 U10.2 ; U9.7@1844.68,1807.88 U9.7 ; R1.1 1878,1616 1891,1603 1914.19,1603 ; C17.2 1914.19,1603 ; 1978,1603 1914.19,1603 ; v1(2435,1737) U12.8 ; v1(3104.09,1398) C40.1 ; U17.5@3243.53,1519.28 v1(3313,1519.28) ; v1(3366.72,1580.15) C7.1@3366.72,1649.62 ; v1(3416.72,1401.72) C23.1@3486.19,1401.72 ; U13.33@3469.53,1855.47 U13.3 ; U11.5@3544.53,1518.28 v1(3614,1518.28) ; U18.3 U18.29@3557.31,2325.32 ; C30.1@3677.53,1934 v1(3736.06,1934) ; C22.1@3680.81,1637.28 v1(3750.28,1637.28) ; C41.1 3756.43,2191.43 v1@3786,2221
  915MHz_top w20: v1(2887.1,640.4) D2.2 ; C20.1@3000.45,2086 v1(3084.05,2086) ; v1(3129,89) C39.2@3129,172.6 ; C37.2@3148,3750.4 v1(3148,3834) ; v1(3272,89) C38.2@3272,172.6 ; v1(3275.16,723.84) U16.1 ; C36.2@3291,3750.4 v1(3291,3834) ; D3.2 v1(3309.9,2435.6) ; C35.2 v1(3707.65,519) ; C33.2 v1(3878.65,2554) ; C34.2 v1(3878.65,3445) ; v1(3809,521.35) C32.2 ; C42.1 v1(3910.6,2356.43)
  433MHz_top w10: U14.7 U14.9@1936.68,2370.23 ; R3.1 1979.81,2546.13 2056.84,2546.13 ; v1@3688,1801 3719.82,1832.82 P1.5 ; D1.1 3716.53,1953.53 v1(3736.06,1934)
  433MHz_top w20: R3.1 C27.2@2006.69,2534
  433MHz_top w23: U15.2 1699,2383 v1(1764,2448) ; R4.1 1869.33,2380.07 U14.9
  other v1: 2651,71 2651,121 419,167 619,167 819,167 1019,167 1316,169 1516,169 1716,169 1916,169 2184,171 2384,171 2651,171 2651,221 2651,271 205,317 2651,321 1429,365 1629,365 1829,365 2029,365 2651,371 551,378 751,378 951,378 1151,378 2651,421 2294,426 2494,426 373,460 2651,471 2651,521 1920,538 2120,538 189,547 1056,568 1256,568 1456,568 1656,568 2651,571 2240,621 2440,621 2651,621 373,660 2651,671 2651,721 183,734 2340,756 2540,756 1042,767 2651,771 1264,783 2651,821 373,860 2651,871 183,934 1183,950 1111,951 1345,952 1439,953 2651,971 2651,1021 2517,1040 373,1060 2651,1071 1449,1114 1360,1116 2651,1121 1103,1123 1184,1126 183,1134 2651,1171 2651,1221 2517,1240 2651,1271 1364,1295 1176,1299 405,1321 2651,1321 2108,1331 183,1334 1913,1348 2651,1371 2286,1379 2486,1379 866,1405 1066,1405 1266,1405 1466,1405 1666,1405 873,1480 733,1484 1915,1527 2240,1528 70,1530 120,1530 170,1530 220,1530 270,1530 320,1530 370,1530 420,1530 470,1530 520,1530 570,1530 620,1530 1014,1565 870,1579 620,1580 734,1580 2101,1583 1325,1623 620,1630 620,1680 689,1702 1634,1704 1077,1709 2651,1721 2240,1728 620,1730 2651,1771 1486,1774 620,1780 1295,1793 3688,1800.21 2651,1821 702,1827 2651,1871 2651,1921 1698,1949 1149,1953 1474,2042 2651,2071 972,2120 2651,2121 1240,2134 2506,2152 696,2162 2651,2171 2316,2214 3786,2220.21 1104,2281 620,2321 962,2368 698,2369 620,2371 1240,2409 620,2421 2651,2421 620,2471 2651,2471 1417,2515 2407,2517 620,2521 2651,2521 2207,2522 1055,2538 1646,2551 70,2569 120,2569 170,2569 220,2569 270,2569 320,2569 370,2569 420,2569 470,2569 520,2569 570,2569 620,2569 2651,2571 2029,2592 722,2597 858,2599 1756,2602 2651,2621 2546,2654 2651,2671 2305,2673 449,2674 1255,2700 1006,2715 2651,2721 725,2728 856,2728 154,2747 1564,2749 2651,2771 2016,2790 1849,2792 2651,2821 2361,2835 2651,2871 1452,2886 322,2890 1204,2898 2651,2921 2651,2971 138,2977 2543,3021 2651,3021 1199,3062 1098,3067 2651,3071 1433,3072 1515,3072 322,3090 2651,3121 132,3164 2651,3171 1199,3209 1098,3211 1433,3211 1517,3214 2651,3221 2651,3271 2527,3279 322,3290 2213,3338 132,3364 2651,3421 1391,3429 2499,3454 903,3457 1127,3459 2651,3471 322,3490 2259,3500 2651,3521 1797,3546 132,3564 2651,3571 2499,3600 2651,3621 378,3634 2651,3671 1721,3682 1921,3682 2121,3682 2321,3682 843,3695 1043,3695 1243,3695 1443,3695 2651,3721 132,3764 2651,3771 328,3802 2651,3821 2651,3871 488,3889 688,3889 956,3891 1156,3891 1356,3891 1556,3891 1853,3893 2053,3893 2253,3893 2453,3893 2651,3921
  other v2: 1585,759 1685,759 1785,759 1885,759 1985,759 1530,784 1630,809 1730,809 1830,809 1930,809 2005,819 1580,834 592,858 892,858 1960,869 532,883 1012,883 1530,884 642,908 842,908 962,908 1580,934 582,938 532,983 582,1038 1960,1069 532,1083 2010,1119 962,1133 1580,1134 582,1138 532,1183 1012,1183 1530,1184 1635,1189 1735,1189 1960,1189 962,1233 582,1238 1585,1239 1685,1239 1985,1239 532,1283 1012,1283 607,1288 707,1288 907,1288 557,1338 657,1338 957,1338 541,2835 641,2835 941,2835 591,2885 691,2885 891,2885 516,2890 996,2890 1678,2934 1778,2934 2078,2934 566,2935 946,2940 1728,2984 1828,2984 2053,2984 1623,2989 516,2990 996,2990 566,3035 1673,3039 946,3040 2103,3054 516,3090 2053,3104 566,3135 516,3190 566,3235 1673,3239 626,3265 826,3265 946,3265 1623,3289 516,3290 996,3290 2053,3304 576,3310 876,3315 1673,3339 2098,3354 1723,3364 1823,3364 1923,3364 2023,3364 1623,3389 1678,3414 1778,3414 1878,3414 1978,3414 2078,3414
  other v3: 3392.76,1837.76 3440,1837.76 3487.24,1837.76 3392.76,1885 3440,1885 3487.24,1885 3392.76,1932.24 3440,1932.24 3487.24,1932.24
  other v4: 3529.76,2297.76 3577,2297.76 3624.24,2297.76 3529.76,2345 3577,2345 3624.24,2345 3529.76,2392.24 3577,2392.24 3624.24,2392.24
  other v5: 100,100 3900,100 100,3900 3900,3900
LATCHEN: U12.5 U13.21 | length 1452.5
  915MHz_top w10: U12.5 2380,1887 2360,1867 2360,1701 2414,1647 2826.75,1647 3054.9,1875.16 U13.21
LATCHOUT0: U12.2 U13.23 | length 1752.8
  915MHz_top w10: U12.2@2540,2034 2377,2034 2310,1967 2310,1675 2439,1546 2771,1546 3060.79,1835.79 U13.23
LATCHOUT1: U12.9 U13.19 | length 650.9
  915MHz_top w10: U12.9 2871.49,1737 3049.02,1914.53 U13.19
LATCHRST0: U12.3 U13.22 | length 1627.8
  915MHz_top w10: U12.3 2380,1987 2336,1943 2336,1690 2431,1595 2797.37,1595 3057.84,1855.47 U13.22
LATCHRST1: U12.7 U13.20 | length 949.1
  915MHz_top w10: U12.7 2588,1787 2611,1764 2611,1712.15 2628.15,1695 2852.12,1695 3051.96,1894.84 U13.20
LATCHSET0: U10.1 U12.4 U13.17 | length 1876.7
  915MHz_top w10: v1(1730.63,2050.37) U10.1 ; v1@2453,1937 U12.4 ; v1@3269,1997 3312.1,1953.9 U13.17
  433MHz_top w10: v1(1730.63,2050.37) 2342.63,2050.37 v1(2455,1938) 2514,1997 v1@3268,1997
  other v1: 3268,1998
LATCHSET1: U12.6 U13.18 U15.1 | length 2498.2
  915MHz_top w10: v1(1659.63,2423.63) 1659.63,2176.37 1682,2154 1852,2154 1984,2286 2462,2286 2606.5,2141.5 v1(2606.5,1920.5) 2606.5,1865.5 2578,1837 U12.6 ; v1@3261,1947 3273.79,1934.21 U13.18
  433MHz_top w10: U15.1 v1(1659.63,2423.63) ; v1(2606.5,1920.5) 2633,1947 v1@3260,1947
  other v1: 3260,1948
MISO: R8.1 U13.1 | length 188
  915MHz_top w10: U13.1 3595.3,1816.1 R8.1
MOSI: R7.1 U11.3 U13.32 U17.3 | length 1017.6
  915MHz_top w10: R7.1@2981.97,1480.63 v1(3080.28,1480.63) U17.3 ; v1(3381.28,1479.63) U11.3 ; U13.32 v1(3564.39,1784.61)
  433MHz_top w10: v1(3080.28,1480.63) 3083.63,1477.28 3378.94,1477.28 v1(3381.28,1479.63) 3450.76,1479.63 3511,1539.87 3511,1731.21 v1(3564.39,1784.61)
NetC5_2: C5.2 L1.1 TF1.6 | length 179.6
  915MHz_top w16: C5.2@870.43,1864 TF1.6@870.43,1943.57 ; L1.1@877.43,1764 C5.2
NetC6_2: C6.2 L1.2 U1.2 | length 423.6
  915MHz_top w16: U1.2@805.57,1339.43 L1.2
NetC12_2: C12.2 L3.1 TF2.6 | length 248.4
  433MHz_top w16: TF2.6 L3.1@863,2299.43
NetC13_2: C13.2 L3.2 U5.2 | length 533.6
  433MHz_top w16: L3.2 C13.2 U5.2@790.57,2834.57
NetC16_1: C16.1 U9.2 | length 100.4
  915MHz_top w10: C16.1@1801,1656.68 1844.68,1700.37 U9.2
NetC16_2: C16.2 R1.2 U4.3 | length 154.4
  915MHz_top w10: C16.2 R1.2@1837.19,1616.31 ; R1.2@1837.24,1615.74 1837.24,1504.43 U4.3
NetC17_1: C17.1 U9.3 | length 103.3
  915MHz_top w10: U9.3 1864.37,1707.32 C17.1@1915,1656.68
NetC21_1: C21.1 U9.5 | length 76.6
  915MHz_top w10: U9.5 1937.83,1810.85 C21.1
NetC21_2: C21.2 U9.4 | length 76.7
  915MHz_top w10: U9.4 1937.69,1739 C21.2
NetC26_1: C26.1 U14.2 | length 97.2
  433MHz_top w10: C26.1 1936.68,2448.63 U14.2
NetC26_2: C26.2 R3.2 U8.5 | length 126.8
  433MHz_top w10: C26.2 R3.2@1928,2533.69 ; R3.2 U8.5@1928.31,2623.79
NetC27_1: C27.1 U14.3 | length 99.3
  433MHz_top w10: U14.3 1956.37,2443.68 C27.1
NetC31_1: C31.1 U14.5 | length 71.1
  433MHz_top w10: U14.5 2022.83,2344.15 C31.1@2040,2361.32
NetC31_2: C31.2 U14.4 | length 70.3
  433MHz_top w10: U14.4 2024.69,2416 C31.2@2040,2400.69
NetC34_1: C34.1 L4.2 P5.1 | length 560
  915MHz_top w40: P5.1 C34.1 L4.2@3676.94,3211.94
NetC35_1: C35.1 P6.1 U16.2 U16.4 | length 831.6
  915MHz_top w40: P6.1 U16.4@3379.76,1229 ; C35.1@3505,519.94 U16.2 U16.4
NetC36_1: C36.1 C37.1 P3.1 P5.3 | length 697
  915MHz_top w40: C37.1@3148,3675.6 3291,3675.6 3381.6,3675.6 3455,3749 P3.1 ; P5.3 C37.1@3150,3673.6
NetC38_1: C38.1 C39.1 P4.1 P6.3 | length 1207
  915MHz_top w40: P6.3@3131.6,1028.6 3131.6,250 P4.1
NetC41_2: C41.2 U18.6 | length 159.8
  915MHz_top w10: U18.6 3616.37,2172.63 3640,2149 C41.2
NetD2_1: D2.1 R5.1 | length 197.5
  915MHz_top w20: R5.1@2928.37,846 2989,846 3024.9,810.1 D2.1
NetD3_1: D3.1 R6.1 | length 142.5
  915MHz_top w10: R6.1@3171.63,2209 D3.1@3171.63,2351.53
NetE1_1: E1.1 TF1.3 | length 303.3
  915MHz_top w16: E1.1 577,2014 614,2051 TF1.3
NetE1_2: E1.2 TF1.1 | length 304.2
  915MHz_top w16: E1.2 572,1990 611.01,1950.99 TF1.1
NetE2_1: E2.1 TF2.3 | length 304.2
  433MHz_top w16: E2.1 572,1990 611,1951 TF2.3
NetE2_2: E2.2 TF2.1 | length 303.3
  433MHz_top w16: E2.2 577,2014 614.01,2051.01 TF2.1
NetR2_2: R2.2 U9.8 U10.3 | length 157.5
  915MHz_top w10: U9.8 R2.2@1825,1880.4
  915MHz_top w23: R2.2@1821.76,1883.65 U10.3
NetR4_2: R4.2 U14.8 U15.3 | length 178.5
  433MHz_top w10: U15.3@1738.46,2344.15 U14.8
NetR11_2: R11.2 U18.9 | length 499.4
  915MHz_top w10: R11.2 3545.4,2479 3720,2479 3747,2452 3747,2333 3719.63,2305.63 U18.9
NetU1_14: U1.14 U3.1 | length 238.1
  915MHz_top w16: U1.14@1012,1034 1243,1034 U3.1
NetU2_2: U2.2 U3.3 | length 231.6
  915MHz_top w16: U3.3@1298.11,1033.76 U2.2@1529.76,1033.76
NetU2_14: U2.14 U4.1 | length 208.8
  915MHz_top w16: U2.14@1837.24,1241.24 U4.1@1837.24,1450
NetU5_14: U5.14 U7.2 | length 261.7
  433MHz_top w16: U5.14 U7.2@1257.72,3140
NetU6_2: U6.2 U7.5 | length 250.9
  433MHz_top w16: U7.5 U6.2@1623,3140.24
NetU6_14: U6.14 U8.2 | length 195.7
  433MHz_top w16: U8.2 U6.14@1928.24,2933.76
P2.4: R6.2 U13.14 | length 290.7
  915MHz_top w10: R6.2@3248.4,2209 3410.47,2046.93 U13.14
R\S\T\/C2CK: P2.7 R10.1 U13.9 | length 1374.2
  915MHz_top w10: P2.7 3246,2843 3246,2306 3508.9,2043.1 U13.9
  433MHz_top w23: P2.7 3187,2902 R10.1
SCLK: R9.1 U11.2 U13.2 U17.2 | length 1135.7
  915MHz_top w10: R9.1 3080.28,1558.31 v1(3080.28,1520) U17.2 ; v1(3381.28,1519) U11.2 ; U13.2 v1@3630,1835.79
  433MHz_top w10: v1(3080.28,1520) 3209,1520 3235,1494 3301.51,1494 3302.23,1493.28 3323.77,1493.28 3349.49,1519 v1(3381.28,1519) 3464,1519 3495,1550 3495,1775.62 3554.38,1835 v1(3630,1835)
UART_RX: U13.29 U18.26 | length 847.4
  915MHz_top w10: v1(3440.92,1689.92) 3449.84,1698.84 U13.29 ; v1(3441,2205) 3441,2312 3454.32,2325.32 U18.26
  433MHz_top w10: v1(3440.92,1689.92) 3348,1782.84 3348,2112 v1(3441,2205)
UART_TX: U13.30 U18.25 | length 1018.1
  915MHz_top w10: v1(3404,2205) 3404,2315 3434,2345 U18.25 ; v1(3453,1634) 3469.53,1650.53 U13.30
  433MHz_top w10: v1(3404,2205) 3325,2126 3325,1762 v1(3453,1634)
VBUS: C33.1 C42.2 D1.4 L4.1 P1.1 U13.8 U18.7 U18.8 | length 1900.4
  915MHz_top w10: U13.8 3540.39,1972.39 3646,2078 3773,2078 3829,2134 C42.2@3829,2286.55 ; U18.7 3657.46,2253.46 3668.54,2264.54 U18.8 C42.2@3829,2285.94
  915MHz_top w20: v1(3592,2554) C33.1@3673.06,2554
  915MHz_top w40: C33.1@3675,2555.94 L4.1
  433MHz_top w15: D1.4 3724.4,2127.6 v1(3773,2079) 3773,1947 3784.82,1935.18 P1.1
  433MHz_top w20: v1(3592,2554) 3684,2554 3724.4,2513.6 D1.4
pads on no net: P1. P1.4 P2.5 P2.6 P2.8 P2.10 TF1.2 TF1.5 TF2.2 TF2.5 U12.1 U12.10 U12.11 U12.12 U12.13 U12.14 U12.15 U13.4 U13.5 U13.11 U13.12 U13.13 U13.28 U13.31 U18.1 U18.2 U18.10 U18.11 U18.12 U18.13 U18.14 U18.15 U18.16 U18.17 U18.18 U18.19 U18.20 U18.21 U18.22 U18.23 U18.24 U18.27 U18.28

## Polygon pours and split planes (outlines as drawn)
GND on 915MHz_top "top_rf_pour" (solid, remove dead copper, pour order 15): 10.09,10.09 10.09,3989.91 2711.91,3989.91 2712,3990 2712,10
GND on 915MHz_top "u1_pour" (solid, pour order 16): 502,828 672,828 672,928 812,928 812,828 1042,828 1042,963 942,963 942,1103 1042,1103 1042,1368 877,1368 877,1268 737,1268 737,1368 502,1368
GND on 915MHz_top "u1_pour" (solid, pour order 14): 2040,729 2040,899 1940,899 1940,1039 2040,1039 2040,1269 1905,1269 1905,1169 1765,1169 1765,1269 1500,1269 1500,1104 1600,1104 1600,964 1500,964 1500,729
GND on 433MHz_top "u1_pour" (solid, pour order 13): 486,3345 656,3345 656,3245 796,3245 796,3345 1026,3345 1026,3210 926,3210 926,3070 1026,3070 1026,2805 861,2805 861,2905 721,2905 721,2805 486,2805
GND on 433MHz_top "u1_pour" (solid, pour order 12): 2133,3444 2133,3274 2033,3274 2033,3134 2133,3134 2133,2904 1998,2904 1998,3004 1858,3004 1858,2904 1593,2904 1593,3069 1693,3069 1693,3209 1593,3209 1593,3444
GND on 433MHz_top "top_rf_pour" (solid, remove dead copper, pour order 8): 10.09,10.09 10.09,3989.91 2711.91,3989.91 2712,3990 2712,10
GND on 915MHz_bottom (split plane): 3989.91,10.09 10.09,10.09 10.09,1550 600,1550 600,2550 10.09,2550 10.09,3989.91 3989.91,3989.91
+3.3V on 433MHz_bottom (split plane): 3717.9,3141.68 3717.9,425.32 3562.44,269.86 3560,270.1 2782.08,270.1 2782.08,3281.9 3577.68,3281.9
+5V on 433MHz_bottom (split plane): 3989.91,10.09 2782,10.09 2782,38.6 2782.08,40 2782.08,229.9 3560,229.9 3563.92,230.29 3567.69,231.43 3571.17,233.29 3572.24,234.17 3575,233.9 3578.92,234.29 3582.69,235.43 3586.17,237.29 3589.21,239.79 3752.21,402.79 3754.71,405.83 3756.57,409.31 3757.71,413.08 3758.1,417 3758.1,3150 3757.71,3153.92 3756.57,3157.69 3754.71,3161.17 3752.21,3164.21 3600.21,3316.21 3597.17,3318.71 3593.69,3320.57 3589.92,3321.71 3586,3322.1 2782.08,3322.1 2782.08,3960 2782,3961.4 2782,3989.91 3989.91,3989.91
GND on 433MHz_bottom (split plane): 2681.92,3960 2681.92,40 2682,38.6 2682,10.09 10.09,10.09 10.09,1550 600,1550 600,2550 10.09,2550 10.09,3989.91 2681.92,3989.91

## Other copper
915MHz_top:
  rectangle net GND: 1840,1771 1849,1800
  rectangle net GND: 10,10 200,200
  region net GND: 3990,200 3800,200 3800,10 3990,10
  region net GND: 3990,3990 3800,3990 3800,3800 3990,3800
  rectangle net GND: 10,3800 200,3990
  rectangle net GND: 10.09,10.09 3990,50
  rectangle net GND: 3950,10.09 3990,3990
  rectangle net GND: 10,3950 3990,3990
  rectangle net GND: 10.09,2550 50,3989.91
  rectangle net GND: 10.09,10.09 50,1550
  rectangle net GND: 10.09,1510 600,1550
  rectangle net GND: 10.09,2550 600,2590
  rectangle net GND: 600,1510 640,1800
  rectangle net GND: 600,2300 640,2590
  rectangle net +5V: 2787,3355 3009,3742
  rectangle net +3.3V: 2822,930 3055,1364
433MHz_top:
  rectangle net GND: 3950,2100 3990,3990
  rectangle net GND: 600,2300 640,2590
  rectangle net GND: 600,1510 640,1800
  rectangle net GND: 10.09,2550 600,2590
  rectangle net GND: 10.09,1510 600,1550
  rectangle net GND: 10.09,10.09 50,1550
  rectangle net GND: 10.09,2550 50,3989.91
  rectangle net GND: 10,3950 3990,3990
  rectangle net GND: 3950,10.09 3990,1660
  rectangle net GND: 10.09,10.09 3990,50
  rectangle net GND: 10,3800 200,3990
  region net GND: 3990,3990 3800,3990 3800,3800 3990,3800
  region net GND: 3990,200 3800,200 3800,10 3990,10
  rectangle net GND: 10,10 200,200
915MHz_bottom (plane layer: these items are gaps in the copper):
  rectangle: 10.09,1550 600,2550
433MHz_bottom (plane layer: these items are gaps in the copper):
  rectangle: 10.09,1550 600,2550
  rectangle: 2682,-7 2782,71
  rectangle: 2681.92,3960 2782,4009
  lines w40: 2733,250 3560,250 ; 2733,3302 3586,3302 3738,3150 3738,417 3575,254
  lines w100: 2732,40 2732,3960

## Silkscreen, mask and mechanical layers (free items; w line width, h text height)
Top Overlay:
  region: 323 vertices and 0 holes, not listed, extent 2739.55,205.86 3060.99,436.14
Top Solder:
  rectangle: 600,2300 640,2590
  rectangle: 600,1510 640,1800
  rectangle: 10.09,2550 600,2590
  rectangle: 10.09,1510 600,1550
  rectangle: 10.09,10.09 50,1550
  rectangle: 10.09,2550 50,3989.91
  rectangle: 10,3950 3990,3990
  rectangle: 3950,10.09 3990,3990
  rectangle: 10.09,10.09 3990,50
  rectangle: 10,3800 200,3990
  region: 3990,3990 3800,3990 3800,3800 3990,3800
  region: 3990,200 3800,200 3800,10 3990,10
  rectangle: 10,10 200,200
  rectangle: 10.09,1510 640,2550
Bottom Solder:
  rectangle: 3950,2100 3990,3990
  rectangle: 3950,10.09 3990,1660
  rectangle: 600,2300 640,2590
  rectangle: 600,1510 640,1800
  rectangle: 10.09,2550 600,2590
  rectangle: 10.09,1510 600,1550
  rectangle: 10.09,10.09 50,1550
  rectangle: 10.09,2550 50,3989.91
  rectangle: 10,3950 3990,3990
  rectangle: 10.09,10.09 3990,50
  rectangle: 10,3800 200,3990
  region: 3990,3990 3800,3990 3800,3800 3990,3800
  region: 3990,200 3800,200 3800,10 3990,10
  rectangle: 10,10 200,200
  rectangle: 10.09,1510 640,2550
Board Shape:
  the board outline again, w16
Design Notes (Mech5):
  lines w20: 4117,3812 6427,3812
  text "FABRICATION NOTES" at 4172,3852 h120
  text "Board Notes" at 4167,3667 h80
  text "Size (x/y/z): 4000 mil x 4000 mil x 62 mil" at 4247,3542 h60
  text "Number of Holes: 505" at 4247,3447 h60
  text "Smallest Trace Width: 10 mil" at 4242,3337 h60
  text "Smallest Hole Size: 15 mil" at 4242,3232 h60
  text "Board Material & Stackup" at 4142,3012 h80
  text "Material: FR4" at 4247,2902 h60
  text "Finish: Pb-Free" at 4238,2795 h60
  text "Soldermask: Green LPI" at 4243,2695 h60
  text "Silkscreen: White" at 4243,2595 h60
  text "Copper: 1 oz. Cu" at 4243,2500 h60
  text "Stackup:" at 4238,2415 h60
  text "1. Top Layer: Routing (.gtl)" at 4317,2313 h60
  text "2. GND Plane: Plane - Negative (.gp1)" at 4310,2213 h60
  text "3. GND/Power Plane: Split Plane - Negative (.gp2)" at 4310,2098 h60
  text "4. Bottom Layer: Routing (.gbl)" at 4314,1994 h60

## Text inside footprints (layer, text, board x,y; h text height)
P2: Top Overlay "2" at 3000,2609 h50 r90; Top Overlay "1" at 3100,2629 h50 r90; Top Overlay "9" at 3102,3178 h50 r90; Top Overlay "10" at 3000,3178 h50 r90